# EAGLE board esquemático (EAGLE 9.6.2)
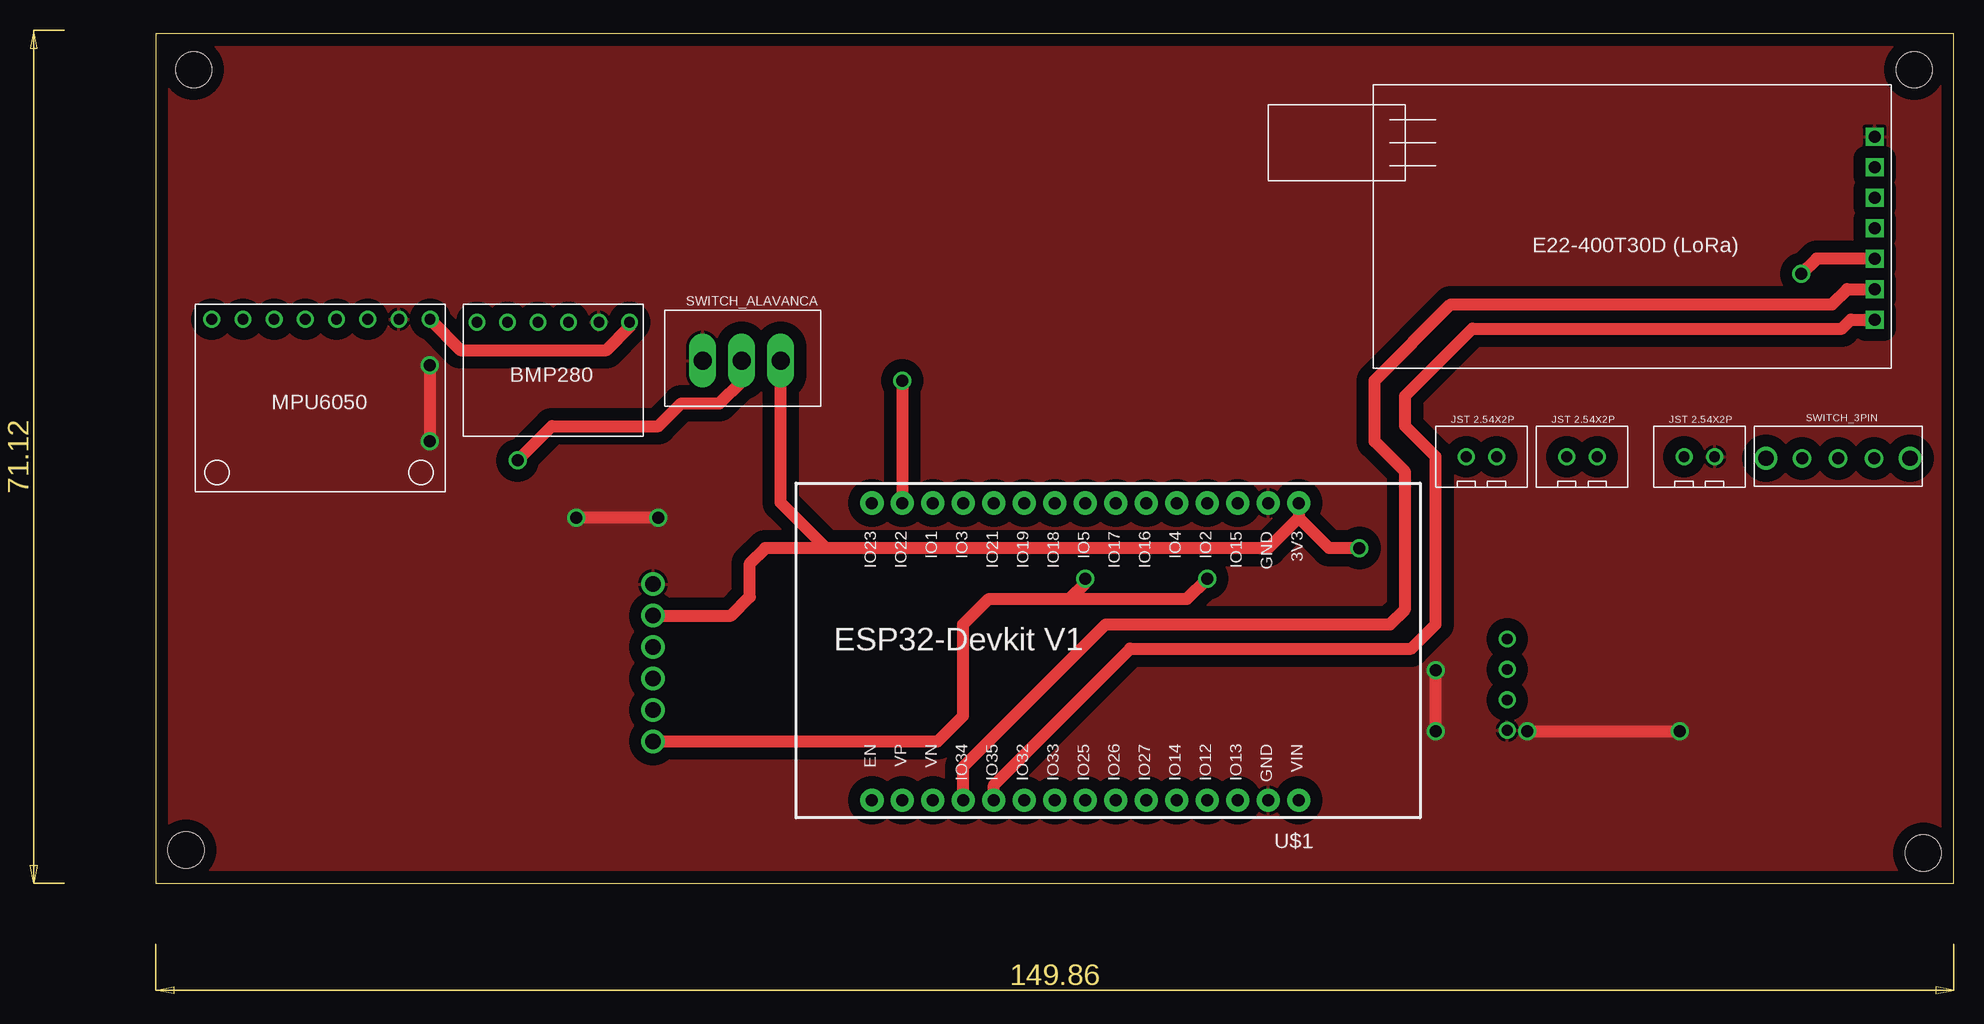
[diagram p0: board, top side]
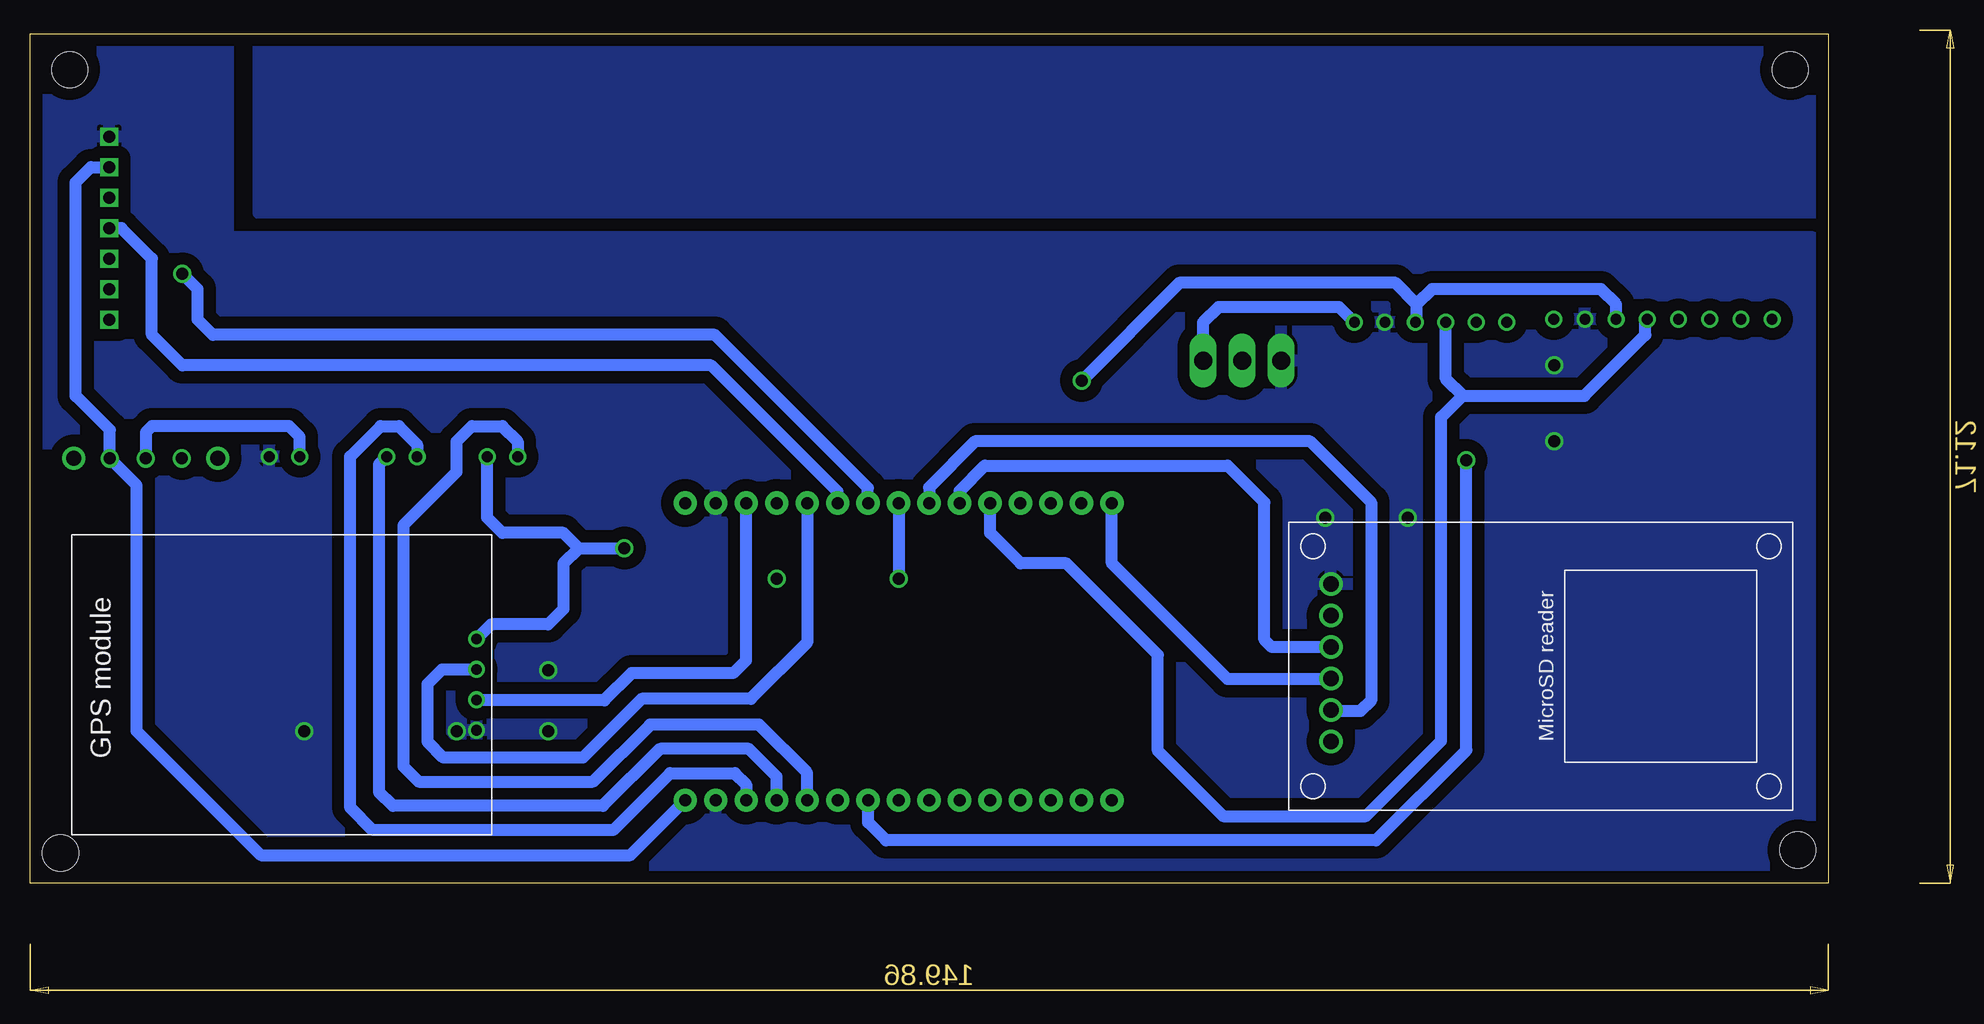
[diagram p1: board, bottom side, seen from below]

Size 149.84 x 70.79 mm. Coordinates in mm from the lower left corner, seen from the top.
Outline: 0,0 149.84,0 149.84,70.79 0,70.79 0,0
Copper layers (1*16): Top 0.035mm / dielectric 1.5mm / Bottom 0.035mm
Design rules "default *": minimum track width 1mm, minimum drill 0.35mm, track to track 40mil, track to pad 0.7mm, pad to pad 6mil, via to via 6mil, smd to smd 6mil, copper to edge 40mil, drill to drill 6mil, minimum pad ring 10mil, minimum via ring 8mil, stop-mask expansion 4mil, vias tented up to drill 0mil, thermal gap 10mil
Holes 3 mm at 3.17,67.82 2.54,2.79 147.32,2.54 146.56,67.82

## Footprints (pad centres in the part's own frame; a part is rotated, then mirrored left to right if it is on the bottom)
ESP32-DEVKITV1 = drill 1 pad 1.93: 1 -22.87,-13.54; 2 -20.33,-13.54; 3 -17.79,-13.54; 4 -15.25,-13.54; 5 -12.71,-13.54; 6 -10.17,-13.54; 7 -7.63,-13.54; 8 -5.09,-13.54; 9 -2.55,-13.54; 10 -0.01,-13.54; 11 2.53,-13.54; 12 5.07,-13.54; 13 7.61,-13.54; 14 10.15,-13.54; 15 12.69,-13.54; 16 12.69,11.23; 17 10.15,11.23; 18 7.61,11.23; 19 5.07,11.23; 20 2.53,11.23; 21 -0.01,11.23; 22 -2.55,11.23; 23 -5.09,11.23; 24 -7.63,11.23; 25 -10.17,11.23; 26 -12.71,11.23; 27 -15.25,11.23; 28 -17.79,11.23; 29 -20.33,11.23; 30 -22.87,11.23
E22-400T30D_FOOTPRINT = drill 1 square: AUX -16.383,-0.762; GND -16.383,-5.842; M0 -16.383,9.398; M1 -16.383,6.858; RXD -16.383,4.318; TXD -16.383,1.778; VCC -16.383,-3.302
GPS_MODULE_FOOTPRINT = drill 0.9: GND -4.01,-16.51; RX 1.07,-16.51; TX -1.47,-16.51; VCC 3.61,-16.51
BMP280_FOOTPRINT = drill 0.891: CSB 3.686,-6.12; GND -3.934,-6.12; SCL -1.395,-6.12; SDA 1.145,-6.12; SDO 6.226,-6.12; VCC -6.474,-6.12
SWITCH_ALAVANCA_FOOTPRINT = drill 1.5 long: PIN1 -3.302,-2.54; PIN2 -0.052,-2.54; PIN3 3.198,-2.54
MPU6050_FOOTPRINT = drill 0.891: ADO 6.686,-10.184; GND -6.314,-10.184; INT 9.286,-10.184; SCL -3.715,-10.184; SDA -1.115,-10.184; VCC -8.915,-10.184; XCL 4.085,-10.184; XDA 1.486,-10.184
MICROSD_READER_FOOTPRINT = drill 1.3: CS 6.449,-8.692; GND -6.651,-8.692; MISO -1.411,-8.692; MOSI 1.209,-8.692; SCK 3.829,-8.692; VCC -4.031,-8.692
JST2.54X2P_FOOTPRINT = drill 0.9: 1 -1.27,0; 2 1.27,0
SWITCH_3PIN = drill 1: 1 -3,-0.018; 2 0,-0.018; 3 3,-0.018 | drill 1.27: P$1 -6,0; P$2 6,0

## Placement (x,y rotation side)
U$1  ESP32DEVKITV1  [ESP32-DEVKITV1]  72.39,18.16 180 top
U$2  E22-400T30D  [E22-400T30D_FOOTPRINT]  126.87,56.39 180 top
U$3  GPS_MODULE  [GPS_MODULE_FOOTPRINT]  129.16,16.76 90 bottom
U$4  BMP280V1  [BMP280_FOOTPRINT]  33.02,40.64 180 top
U$5  SWITCH_ALAVANCA  [SWITCH_ALAVANCA_FOOTPRINT]  48.9,46.1 0 top
U$6  MPU6050V1  [MPU6050_FOOTPRINT]  13.97,36.83 180 top
U$7  MICROSD_READER  [MICROSD_READER_FOOTPRINT]  32.77,18.29 270 bottom
U$8  JST2.54X2P  [JST2.54X2P_FOOTPRINT]  118.87,35.56 0 top
U$9  JST2.54X2P  [JST2.54X2P_FOOTPRINT]  110.49,35.56 0 top
U$11  SWITCH_3PIN  [SWITCH_3PIN]  140.21,35.43 0 top
U$12  JST2.54X2P  [JST2.54X2P_FOOTPRINT]  128.65,35.56 0 top

## Library data of the parts
U$1 = ESP32-DEVKITV1
U$2-U$9 U$11 U$12 = CRD

## Nets
BUZZER: U$1.26 U$9.1
CS: U$1.8 U$7.CS
ENABLE_SIGNAL: U$1.24 U$5.PIN2
GND: U$1.2 U$1.29 U$2.GND U$3.GND U$4.GND U$5.PIN1 U$6.GND U$7.GND U$12.2
M0: U$1.20 U$2.M0
M1: U$1.19 U$2.M1
MISO: U$1.10 U$7.MISO
MOSI: U$1.15 U$7.MOSI
RX1_ESP: U$1.3 U$3.TX
RX2_ESP: U$1.6 U$2.TXD
SCK: U$1.9 U$7.SCK
SCL: U$1.14 U$4.SCL U$6.SCL
SDA: U$1.11 U$4.SDA U$6.SDA
SKIB1: U$1.28 U$8.1
SKIB2: U$1.27 U$8.2
TX1_ESP: U$1.5 U$3.RX
TX2_ESP: U$1.7 U$2.RXD
V_3V3: U$1.1 U$3.VCC U$4.VCC U$5.PIN3 U$6.VCC U$7.VCC U$9.2
V_BATTERY: U$11.2 U$12.1
V_IN: U$1.30 U$2.VCC U$11.3

## Tracks (layer width: path | path; a pad name or v marks a point on that pad's centre or on a via)
ANTENNA
  pour Bottom: 1.27,69.85 1.27,55.88 130.81,55.88 130.81,69.85
BUZZER
  Bottom 1: U$1.26 85.1,9.21 89.12,13.23 98.19,13.23 102.95,8.48 117.47,8.48 118.75,9.75 118.75,29.84 114.3,34.29 114.3,36.83 113.03,38.1 110.49,38.1 109.22,36.83 U$9.1
CS  (via drill 1)
  Top 1: 76.2,23.72 85.95,23.72 v87.63,25.4 | v77.47,25.4 77.47,24.99 76.2,23.72 | U$7.CS 65.18,11.84 67.31,13.97 67.31,21.59 69.44,23.72 76.2,23.72
  Bottom 1: U$1.8 v77.48,25.41 v77.47,25.4
ENABLE_SIGNAL  (via drill 1)
  Top 1: U$5.PIN2 48.84,41.86 46.99,40.01 43.81,40.01 41.91,38.1 33.02,38.1 v30.17,35.25
  Bottom 1: U$1.24 80.01,5.08 78.52,3.59 37.7,3.59 30.17,11.12 v30.17,35.25
GND  (via drill 1)
  Top 1: v114.3,12.7 v127,12.7 | v106.68,12.7 v106.68,17.78 | v41.91,30.48 v35.05,30.48 | v22.86,43.18 v22.86,36.83
  pour Bottom: 1.27,53.85 133.35,53.85 133.35,69.85 148.59,69.85 148.59,1.27 1.27,1.27
  pour Top: 0,71.12 0,0 149.86,0 149.86,71.12
M0
  Top 1: U$1.20 69.86,8.2 81.22,19.56 104.65,19.56 106.68,21.59 106.68,35.56 104.14,38.1 104.14,40.64 109.74,46.24 140.53,46.24 141.28,46.99 U$2.M0
M1
  Top 1: U$2.M1 140.97,49.53 139.7,48.26 107.95,48.26 101.6,41.91 101.6,36.83 104.14,34.29 104.14,22.86 102.87,21.59 79.2,21.59 67.32,9.71 U$1.19
MISO
  Bottom 1: U$1.10 72.4,32.7 70.28,34.81 50.05,34.81 46.99,31.75 46.99,20.32 46.37,19.7 U$7.MISO
MOSI
  Bottom 1: U$1.15 59.7,26.68 50.05,17.03 41.5,17.03 U$7.MOSI
RX1_ESP
  Bottom 1: U$3.TX 112.61,15.26 102,15.26 99.73,17.52 91.26,17.52 90.18,18.6 U$1.3
RX2_ESP
  Bottom 1: U$1.6 82.58,31.72 82.58,32.66 93.09,43.18 137.16,43.18 139.7,45.72 139.7,52.07 142.24,54.61 U$2.TXD
SCK
  Bottom 1: U$1.9 74.94,33.01 71.12,36.83 43.18,36.83 38.1,31.75 38.1,15.24 38.99,14.35 41.35,14.35 U$7.SCK
SCL  (via drill 1)
  Top 1: v62.23,41.91 U$1.14
  Bottom 1: U$4.SCL 34.29,46.88 34.29,48.26 | U$6.SCL 17.68,48.26 18.95,49.53 33.02,49.53 34.29,48.26 | v62.23,41.91 54.1,50.04 36.07,50.04 34.29,48.26
SDA
  Bottom 1: U$1.11 69.86,29.22 67.31,26.67 63.5,26.67 55.88,19.05 55.88,11.05 50.44,5.6 38.53,5.6 32.26,11.88 32.26,38.86 30.48,40.64 | U$6.SDA 15.24,46.86 15.24,45.72 20.32,40.64 30.48,40.64 | 30.48,40.64 31.88,42.03 U$4.SDA
SKIB1
  Bottom 1: U$8.1 117.6,36.58 119.13,38.1 120.65,38.1 123.19,35.56 123.19,6.35 121.28,4.45 101.28,4.45 96.52,9.2 91.12,9.2 90.18,8.27 U$1.28
SKIB2
  Bottom 1: U$1.27 87.64,8.9 89.96,11.22 97.36,11.22 102.11,6.46 119.62,6.46 120.78,7.62 120.78,34.92 U$8.2
TX1_ESP
  Bottom 1: U$1.5 85.1,20.07 89.79,15.38 98.9,15.38 103.78,10.49 115.41,10.49 116.73,11.81 116.73,16.62 115.52,17.83 U$3.RX
TX2_ESP  (via drill 1)
  Top 1: U$2.RXD 138.43,52.07 v137.16,50.8
  Bottom 1: U$1.7 80.04,31.72 80.04,32.97 92.78,45.72 134.62,45.72 135.89,46.99 135.89,49.53 v137.16,50.8
V_3V3  (via drill 1)
  Top 1: v100.33,27.94 97.79,27.94 95.25,30.48 | 55.88,27.94 92.71,27.94 95.25,30.48 | 55.88,27.94 50.8,27.94 49.53,26.67 49.53,23.88 47.97,22.32 U$7.VCC | 55.88,27.94 52.09,31.73 U$5.PIN3 | U$1.1 95.25,30.48 | U$6.VCC 22.88,46.97 25.4,44.45 37.57,44.45 39.49,46.38 U$4.VCC
  Bottom 1: U$9.2 111.76,30.48 110.49,29.21 105.41,29.21 104.14,27.94 | 104.14,27.94 105.41,26.67 105.41,22.86 106.68,21.59 111.43,21.59 U$3.VCC | 104.14,27.94 v100.33,27.94 | U$5.PIN3 52.09,46.76 52.07,46.76 50.81,48.02 40.76,48.02 U$4.VCC
V_BATTERY
  Bottom 1: U$12.1 127.38,37.21 128.27,38.1 139.7,38.1 140.21,37.59 U$11.2
V_IN
  Bottom 1: U$1.30 99.83,2.36 130.63,2.36 140.97,12.7 140.97,33.18 U$11.3 143.21,37.8 146.05,40.64 146.05,58.42 144.78,59.69 U$2.VCC